# EAGLE board Addon-mapleCUx_Raspi-3V3-UART-CC2530-V02-05 (EAGLE 9.1.0)
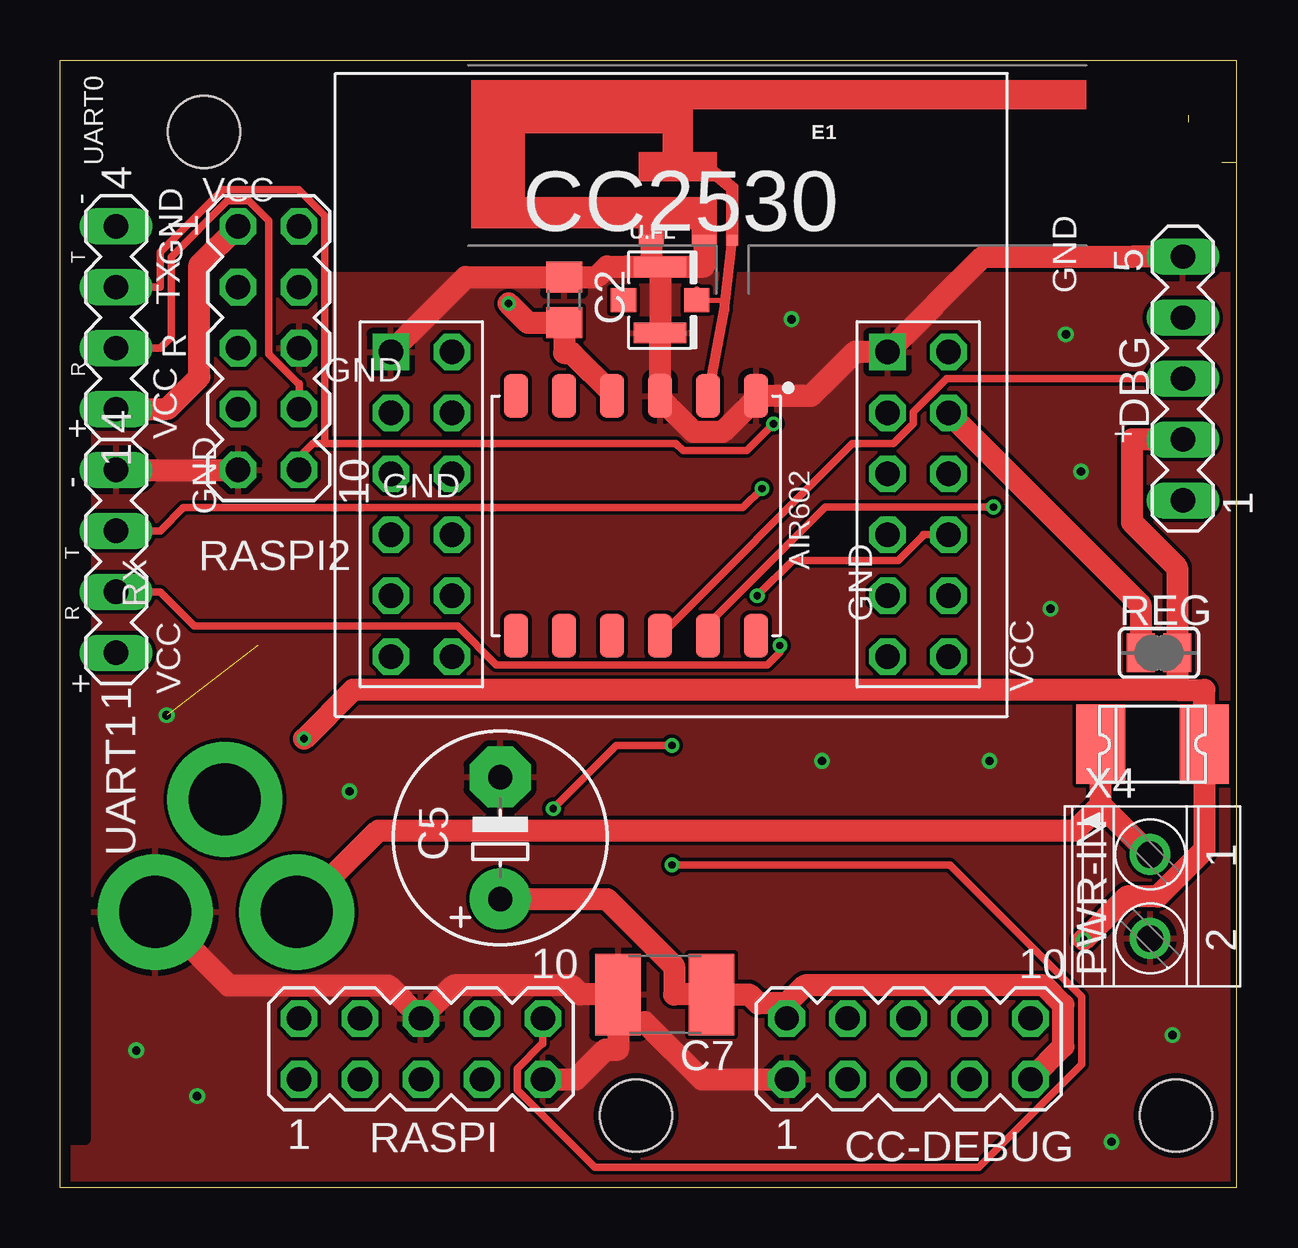
[diagram p0: board, top side]
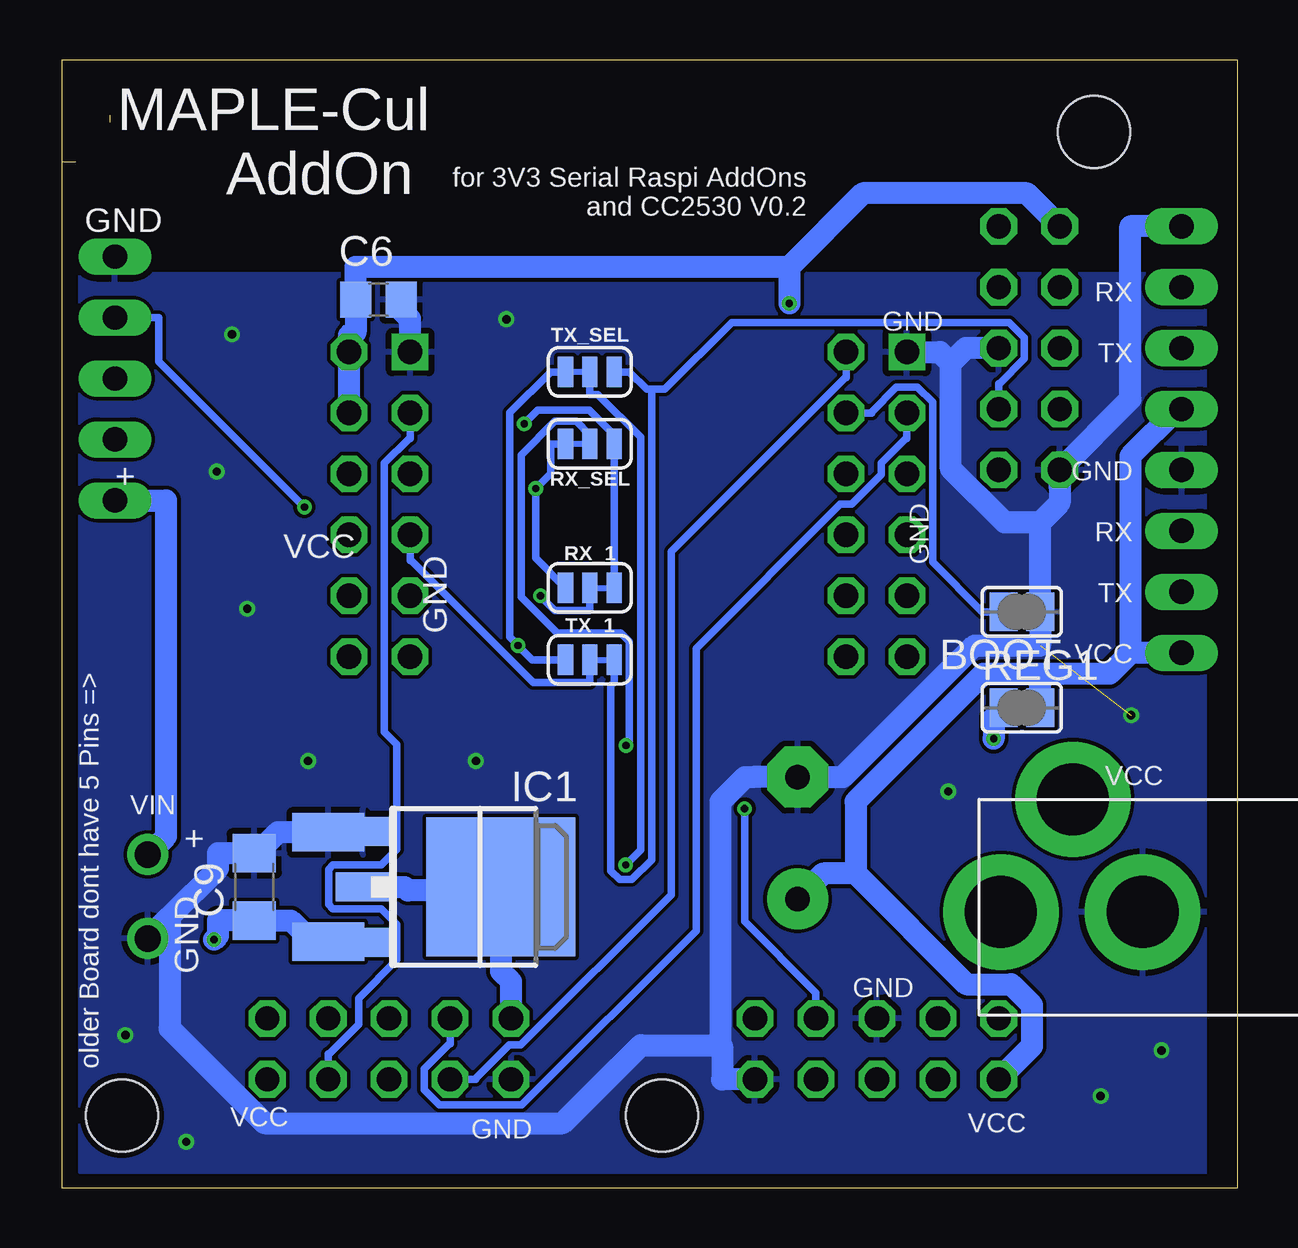
[diagram p1: board, bottom side, seen from below]

Size 49 x 47 mm. Coordinates in mm from the lower left corner, seen from the top.
Outline: 49,47 49,46.24
Outline: 47,44.7 47,44.41
Outline: 48.41,42.75 49,42.75
Outline: 49,47 0,47 0,0 49,0 49,42.75
Outline: 49,47 49,42.75
Copper layers (1*16): Top 0.035mm / dielectric 1.5mm / Bottom 0.035mm
Design rules "SeeedStudio_2layer_DRU_no_angle_20140221": minimum track width 6mil, minimum drill 12mil, track to track 6mil, track to pad 6mil, pad to pad 6mil, via to via 6mil, smd to smd 0mil, copper to edge 10mil, drill to drill 10mil, minimum pad ring 10mil, minimum via ring 6mil, stop-mask expansion 2mil, vias tented up to drill 100mil, thermal gap 10mil
Net classes: 0 default: width 0.305 mm; 1 PWR: width 0.914 mm
Holes 3 mm at 6,44 24,3 46.5,3
tRestrict: area 0.4,2 to 1.1,47.1
bRestrict: area 0.4,0.7 to 1.1,46.4

## Footprints (pad centres in the part's own frame; a part is rotated, then mirrored left to right if it is on the bottom)
MODULE12P-2.0-10X12MM = smd 1.8 x 1: 1 -5,5; 2 -5,3; 3 -5,1; 4 -5,-1; 5 -5,-3; 6 -5,-5; 7 5,-5; 8 5,-3; 9 5,-1; 10 5,1; 11 5,3; 12 5,5
SJ = smd 1.168 x 1.6: 1 -0.762,0; 2 0.762,0
C0805 = smd 1.3 x 1.5: 1 -0.95,0; 2 0.95,0
E5-8,5 = drill 1.016 pad 2.54: + -2.54,0 | drill 1.016 pad 2.54 octagon: - 2.54,0
C1812 = smd 1.9 x 3.4: 1 -1.95,0; 2 1.95,0
C1206 = smd 1.6 x 1.8: 1 -1.4,0; 2 1.4,0
MA05-2 = drill 1.016 octagon: 1 -5.08,-1.27; 2 -5.08,1.27; 3 -2.54,-1.27; 4 -2.54,1.27; 5 0,-1.27; 6 0,1.27; 7 2.54,-1.27; 8 2.54,1.27; 9 5.08,-1.27; 10 5.08,1.27
MA05-1 = drill 1.016 long: 1 -5.08,0; 2 -2.54,0; 3 0,0; 4 2.54,0; 5 5.08,0
TRACE_ANTENNA_2.4GHZ_25.7MM = smd 0.46 x 0.46: ANT 0,0.23 | smd 1 x 0.46: GND -1.18,0.23; GND2 -3.38,0.23
1812L = smd 2.03 x 3.3: P$1 -2.16,0; P$2 2.16,0
DPACK = smd 1.6 x 3: 1 -2.28,-4.8; 3 2.28,-4.8 | smd 5.8 x 6.2: 4 0,2.38
SOT223 = smd 1.219 x 2.235: 1 -2.311,-3.099; 2 0,-3.099; 3 2.311,-3.099 | smd 3.6 x 2.2: TAB 0,3.099
SMT-JUMPER_3_1-NC_TRACE_SILK = smd 0.635 x 1.27: 1 -1.016,0; 2 0,0; 3 1.016,0
PJ-102A = drill 3 pad 4.8: RING 0.1,-3.39; RING_SW -4.6,-6.29; TIP 0.1,-9.29
CC2530_DIL = drill 1.016 square: GND 2.316,15.19; GND2 23.017,15.19 | drill 1.016 octagon: P0_0 23.017,10.11; P0_1 25.557,10.11; P0_2\U_RX 23.017,7.57; P0_3\U_TX 25.557,7.57; P0_4 23.017,5.03; P0_5 25.557,5.03; P0_6 23.017,2.49; P0_7 25.557,2.49; P1_0 4.856,2.49; P1_1 2.316,2.49; P1_2 4.856,5.03; P1_3 2.316,5.03; P1_4 4.856,7.57; P1_5 2.316,7.57; P1_6 4.856,10.11; P1_7 2.316,10.11; P2_0 4.856,12.65; P2_1 2.316,12.65; P2_2 4.856,15.19; RST 23.017,12.65; VCC 25.557,15.19; VCC2 25.557,12.65
U.FL = smd 2.2 x 0.85: 1 0,1.375; 2 0,-1.375 | smd 1.05 x 1: FEED 1.525,0; NC -1.525,0
MA04-1 = drill 1.016 long: 1 -3.81,0; 2 -1.27,0; 3 1.27,0; 4 3.81,0
1751248 = drill 1.1 pad 1.7: 1 -1.75,-0.1; 2 1.75,-0.1

## Placement (x,y rotation side)
AIR602  [MODULE12P-2.0-10X12MM]  24,28 270 top
BOOT  [SJ]  9,24 180 bottom
C2  22pF  [C0805]  21,37 270 top
C5  220uF  [E5-8,5]  18.34,14.57 90 top
C6  22pF  [C0805]  35.8,37.01 0 bottom
C7  [C1812]  25.2,8.05 0 top
C9  0.1uF  [C1206]  40.98,12.53 90 bottom
CC-DEBUG  [MA05-2]  35.36,5.78 0 top
DBG  [MA05-1]  46.79,33.72 90 top
E1  ANTENNA-GROUNDEDTRACE-25.7MM  [TRACE_ANTENNA_2.4GHZ_25.7MM]  28.02,39.25 0 top
F1  1812L  [1812L]  45.52,18.48 180 top
IC1  LD117ADT50TR  [DPACK]  33.09,12.53 270 bottom
IC6  LM1117MPX-ADJ  [SOT223]  33.36,12.53 270 bottom
RASPI  [MA05-2]  15.04,5.78 0 top
RASPI2  [MA05-2]  8.69,34.99 270 top
REG  [SJ]  45.79,22.29 0 top
REG1  [SJ]  9,20 0 bottom
RX_1  JUMPER-SMT_3_1-NC_TRACE_SILK  [SMT-JUMPER_3_1-NC_TRACE_SILK]  27,25 0 bottom
RX_SEL  JUMPER-SMT_3_1-NC_TRACE_SILK  [SMT-JUMPER_3_1-NC_TRACE_SILK]  27,31 180 bottom
TX_1  JUMPER-SMT_3_1-NC_TRACE_SILK  [SMT-JUMPER_3_1-NC_TRACE_SILK]  27,22 0 bottom
TX_SEL  JUMPER-SMT_3_1-NC_TRACE_SILK  [SMT-JUMPER_3_1-NC_TRACE_SILK]  27,34 180 bottom
U$2  2.1MMJACKTHM  [PJ-102A]  0.58,11.58 270 bottom
U$3  CC2530_MODULE  [CC2530_DIL]  11.47,19.64 0 top
U.FL  U.FL  [U.FL]  25,37 0 top
UART0  [MA04-1]  2.34,36.26 90 top
UART1  [MA04-1]  2.34,26.1 90 top
X4  1751248  [1751248]  45.52,12.13 270 top

## Library data of the parts
AIR602 = AIR602
BOOT REG REG1 = jumper
C2 = rcl
C5-C7 C9 = rcl; SPICEPREFIX: C
CC-DEBUG DBG RASPI RASPI2 UART0 UART1 = con-lstb; OC_FARNELL: unknown; OC_NEWARK: unknown
E1 = SparkFun-RF
F1 = ptc-littlefuse
IC1 = v-reg
IC6 = lm1117
RX_1 RX_SEL TX_1 TX_SEL = SparkFun-Jumpers
U$2 = adafruit
U$3 = Martin-Communication-V4
U.FL = SparkFun-Connectors; PROD_ID: CONN-09193; SF_ID: WRL-09144
X4 = con-phoenix-350; OC_FARNELL: unknown; OC_NEWARK: unknown

## Nets
CS: CC-DEBUG.5
DC: CC-DEBUG.3 U$3.P2_2
DD: CC-DEBUG.4 U$3.P2_1
GND [PWR]: AIR602.1 AIR602.3 BOOT.1 C2.1 C5.- C6.2 C7.1 C9.2 CC-DEBUG.1 DBG.5 E1.GND E1.GND2 IC1.1 IC6.1 RASPI2.6 RASPI2.9 RASPI.6 RASPI.9 U$2.RING U$3.GND U$3.GND2 U.FL.1 U.FL.2 UART0.4 UART1.4 X4.2
IN [PWR]: C9.1 DBG.2 F1.P$1 IC1.3 IC6.3 REG1.1 REG.2
IN2 [PWR]: DBG.1 F1.P$2 U$2.TIP X4.1
MISO: CC-DEBUG.10
MOSI: CC-DEBUG.8
N$1: BOOT.2 U$3.P2_0
N$2: TX_1.2 U$3.P0_2\U_RX
N$3: RX_1.2 U$3.P0_3\U_TX
N$4: AIR602.2 E1.ANT U.FL.FEED
RST: CC-DEBUG.7 U$3.RST
RX: RASPI.10 TX_SEL.2
RX0: RASPI2.10 RX_1.3 RX_SEL.1 UART0.3
RX1: RX_1.1 RX_SEL.3 UART1.3
RX_DBG: AIR602.11 DBG.4
SCLK: CC-DEBUG.6
TX: RASPI.8 RX_SEL.2
TX0: RASPI2.8 TX_1.3 TX_SEL.1 UART0.2
TX1: TX_1.1 TX_SEL.3 UART1.2
TX_DBG: AIR602.10 DBG.3
VCC [PWR]: AIR602.4 C2.2 C5.+ C6.1 C7.2 CC-DEBUG.2 CC-DEBUG.9 IC1.4 IC6.2 IC6.TAB RASPI2.1 RASPI.1 REG1.2 REG.1 U$3.VCC U$3.VCC2 UART0.1 UART1.1

## Tracks (layer width: path | path; a pad name or v marks a point on that pad's centre or on a via)
DC
  Bottom 0.305: CC-DEBUG.3 31.75,4.51 31.75,4.55 30.36,5.94 29.88,5.94 23.62,12.2 23.62,26.51 16.36,33.76 16.33,33.76 U$3.P2_2
DD
  Bottom 0.305: CC-DEBUG.4 32.82,5.98 32.86,5.98 33.89,4.96 33.89,4.07 33.26,3.44 29.84,3.44 22.57,10.7 22.57,22.47 16.57,28.48 16.09,28.48 14.85,29.71 14.85,30.2 13.83,31.22 13.79,31.22 U$3.P2_1
GND  (via drill 0.35)  (1 unrouted)
  Top 0.914: UART1.4 RASPI2.9 | U$3.GND 16.91,37.95 C2.1 22.36,37.95 22.8,38.39 23.62,38.39 24.64,38.39 | DBG.5 44.66,38.8 38.46,38.8 U$3.GND2 33.12,34.83 31.29,33 AIR602.1 29,32.88 27.61,31.49 26.4,31.49 25,32.89 AIR602.3 | U$2.RING 7.03,8.42 13.67,8.42 RASPI.6 16.41,8.42 21.32,8.42 21.69,8.05 C7.1 23.25,7.97 23.25,6.89 | 23.25,6.89 24.36,6.89 26.75,4.51 CC-DEBUG.1 | 23.25,6.89 23.25,5.74 22.72,5.74 21.49,4.51 RASPI.9 | 25,33.24 AIR602.3 | U.FL.1 U.FL.2 AIR602.3 | 24.64,38.39 24.98,38.39 U.FL.1 | E1.GND2 24.64,38.39 | E1.GND 26.84,38.39 25.02,38.39 U.FL.1
  Bottom 0.914: 11.95,34.37 11.33,34.99 RASPI2.6 | 8.24,27.72 9.72,27.72 11.95,29.96 11.95,34.37 | 11.95,34.37 12.41,34.83 U$3.GND | UART0.4 4.47,40.07 4.47,32.86 RASPI2.9 7.42,29.22 7.42,28.54 8.24,27.72 | 21.55,5.94 21.55,16.09 20.53,17.11 20.22,17.11 18.52,17.11 C5.- 16.46,17.11 10.98,22.59 8.24,22.59 BOOT.1 8.24,27.72 | 21.55,5.94 21.49,5.88 21.49,4.51 RASPI.9 | 44.51,11.29 44.51,6.63 40.55,2.68 28.13,2.68 24.88,5.94 21.55,5.94 | 44.51,11.29 42.49,13.31 42.49,13.93 C9.2 40.88,13.93 40,14.81 IC1.1 37.86,14.84 IC6.1 | X4.2 44.51,11.29 | U$3.GND2 34.49,36.2 34.85,36.57 C6.2
  other vias: 4.45,19.68 3.17,5.71 5.71,3.81 43.81,1.91 46.35,6.35 38.73,17.78 31.75,17.78 30.48,36.2 41.91,35.56 42.55,29.84 41.27,24.13 12.06,16.51
  pour Top: 48.77,38.1 0.76,38.1 0.51,37.85 0.51,0.25 48.77,0.25
  pour Bottom: 48.26,38.1 0.64,38.1 0.64,0.64 48.26,0.64
IN  (via drill 0.3 pad 0.61)
  Top 0.914: 46.55,20.74 12.21,20.74 v10.17,18.71 | 46.55,20.74 | 46.55,20.74 47.68,20.74 F1.P$1 47.68,14.07 45.74,12.13 44.46,12.13 v42.66,10.33 | 46.55,20.88 | 46.55,20.88 46.55,20.74 | 46.55,20.88 REG.2 46.55,25.84 44.66,27.74 44.66,31.18 DBG.2
  Bottom 0.914: REG1.1 10.17,19.59 v10.17,18.71 | IC6.3 36.49,10.25 IC1.3 38.59,10.25 39.47,11.13 C9.1 42.49,11.13 42.49,10.49 v42.66,10.33
IN2
  Top 0.914: U$2.TIP 13.27,14.88 42.3,14.88 43.36,15.94 | 43.36,15.94 F1.P$2 | X4.1 43.36,15.94
  Bottom 0.914: DBG.1 44.66,28.64 44.66,14.64 X4.1
N$1
  Bottom 0.305: U$3.P2_0 15.26,32.29 15.26,32.33 14.23,33.36 13.35,33.36 12.72,32.73 12.72,26.07 10.65,24 BOOT.2
N$2
  Bottom 0.305: U$3.P0_2\U_RX 34.49,26.14 34.45,26.14 29.37,21.06 27,21.06 TX_1.2
N$3  (via drill 0.3 pad 0.61)
  Top 0.305: v29.05,24.67 30.53,26.14 34.94,26.14 35.96,27.17 35.96,27.21 U$3.P0_3\U_TX
  Bottom 0.305: v29.05,24.67 29.05,24.64 28.47,24.06 27,24.06 RX_1.2
N$4
  Top 0.203: U.FL.FEED 27.69,37
  Top 0.305: U.FL.FEED 26.52,37.4 | 27.69,37 27.69,36.58
  Top 0.406: AIR602.2 27.69,36.58 E1.ANT
RST
  Bottom 0.305: CC-DEBUG.7 37.9,5.58 37.86,5.58 36.63,6.8 36.63,7.89 35.04,9.48 35.04,10.96 35.69,11.62 37.7,11.62 37.88,11.79 37.88,13.27 37.7,13.44 35.7,13.44 35.04,14.1 35.04,18.46 35.56,18.98 35.56,30.2 34.53,31.22 34.49,31.22 U$3.RST
RX  (via drill 0.3 pad 0.61)
  Top 0.305: v25.51,13.45 37.07,13.45 42.58,7.94 42.58,5.14 38.28,0.84 22.28,0.84 19.05,4.07 19.05,4.96 20.08,5.98 20.12,5.98 RASPI.10
  Bottom 0.305: v25.51,13.45 24.89,14.07 24.89,31.29 26.66,33.06 27,33.06 TX_SEL.2
RX0  (via drill 0.3 pad 0.61)
  Top 0.305: 11.03,31.02 11.03,40.52 9.95,41.6 6.79,41.6 4.17,38.98 4.17,37.53 UART0.3 | 11.03,31.02 25.66,31.02 25.96,30.72 28.62,30.72 v29.73,31.84 | 11.03,31.02 10.54,31.02 9.96,30.44 RASPI2.10
  Bottom 0.305: RX_1.3 RX_SEL.1 25.98,31.37 27.02,32.4 29.17,32.4 v29.73,31.84
RX1  (via drill 0.3 pad 0.61)
  Top 0.305: v29.25,29.14 28.46,28.34 5.14,28.34 4.17,27.37 UART1.3
  Bottom 0.305: RX_1.1 29.25,26.24 v29.25,29.14 28.64,29.75 28.64,31 RX_SEL.3
RX_DBG  (via drill 0.3 pad 0.61)
  Top 0.305: AIR602.11 27,23.49 31.88,28.36 v38.89,28.36
  Bottom 0.305: DBG.4 44.96,36.26 44.96,34.43 v38.89,28.36
TX  (via drill 0.3 pad 0.61)
  Top 0.305: v25.5,18.43 23.19,18.43 v20.55,15.79
  Bottom 0.305: RASPI.8 17.58,8.12 20.55,11.09 v20.55,15.79 | RX_SEL.2 27,31.37 27.57,31.94 28.46,31.94 29.86,30.54 29.86,24.62 28.36,23.11 25.71,23.11 25.35,22.76 25.35,18.57 v25.5,18.43
TX0
  Top 0.305: RASPI2.8 9.96,33.52 9.92,33.52 8.69,34.74 8.69,40.31 7.86,41.14 6.98,41.14 4.63,38.78 4.63,35.45 4.17,34.99 UART0.2
  Bottom 0.305: RASPI2.8 9.96,33.52 9.92,33.52 8.89,34.54 8.89,35.43 9.52,36.06 21.09,36.06 23.87,33.27 24.43,33.27 | 24.43,33.27 24.64,33.27 25.36,34 TX_SEL.1 | 24.43,33.27 24.43,13.66 25.25,12.84 25.76,12.84 26.12,13.2 26.12,20.93 25.98,21.06 TX_1.3
TX1  (via drill 0.3 pad 0.61)
  Top 0.305: UART1.2 4.17,24.83 5.6,23.4 16.57,23.4 18.18,21.79 29.47,21.79 29.99,22.31 v29.99,22.59
  Bottom 0.305: TX_SEL.3 28.64,34 30.35,32.29 30.35,22.95 v29.99,22.59 29.4,22 TX_1.1
TX_DBG
  Top 0.305: DBG.3 36.95,33.72 35.55,32.33 35.55,31.85 34.73,31.02 33.02,31.02 AIR602.10
VCC  (via drill 0.3 pad 0.61)
  Top 0.914: UART0.1 4.47,32.45 5.81,33.79 5.81,38.46 RASPI2.1 | v18.69,36.85 19.49,36.05 C2.2 21,34.79 21.32,34.79 23,33.12 AIR602.4 | U$3.VCC2 45.03,24.29 REG.1 | 30.28,7.67 29.09,7.67 28.71,8.05 C7.2 25.59,8.05 25.59,9.22 22.79,12.03 C5.+ | CC-DEBUG.9 41.81,5.88 41.81,7.62 41.01,8.43 31.03,8.43 30.28,7.67 | CC-DEBUG.2 30.28,7.67
  Bottom 0.914: 18.69,38.37 v18.69,36.85 | RASPI2.1 8.79,41.44 15.62,41.44 18.69,38.37 | 18.69,38.37 36.76,38.37 C6.1 36.76,36.6 36.76,35.65 36.89,35.65 37.03,35.52 U$3.VCC U$3.VCC2 | IC6.2 34.73,12.53 34.58,12.38 30.71,12.38 | 30.71,12.38 IC1.4 IC6.TAB | 30.71,12.38 30.71,12.19 30.71,9.02 30.28,8.59 CC-DEBUG.2 | UART0.1 2.51,32.45 4.47,30.49 4.47,22.29 | UART1.1 4.47,22.29 | 4.47,22.29 5.35,21.41 8.24,21.41 | 15.92,13.09 11.31,8.47 9.44,8.47 8.58,7.61 8.58,5.89 RASPI.1 | 8.24,21.41 10.6,21.41 15.92,16.09 15.92,13.09 | 15.92,13.09 17.28,13.09 C5.+ | REG1.2 8.24,21.41

## Text on the board
tNames: GND | VCC | - | T | TX | GND | R | R | GND | + | VCC | + | - | GND | GND | T | R | RX | VCC | GND | VCC | + | PWR-IN
bNames: MAPLE-Cul / AddOn | for 3V3 Serial Raspi AddOns / and CC2530 V0.2 | GND | RX | GND | TX | GND | + | RX | VCC | GND | GND | TX | VCC | VCC | VIN | + | GND | GND | older Board dont have 5 Pins => | VCC | GND | VCC